# Altium PCB master-ESP32-GPS.PcbDoc
Units mm, origin at the board's own origin, x right, y up, seen from the top; angles counter-clockwise.
Board outline 118.11 x 88.9 mm, 4 copper layers (Top Layer, Signal Layer 1, Signal Layer 2, Bottom Layer), stack 0.778 mm thick; 13 components, 15 nets, 85 pads, 0 vias.
Unrouted connection lines stored in the file: 16.
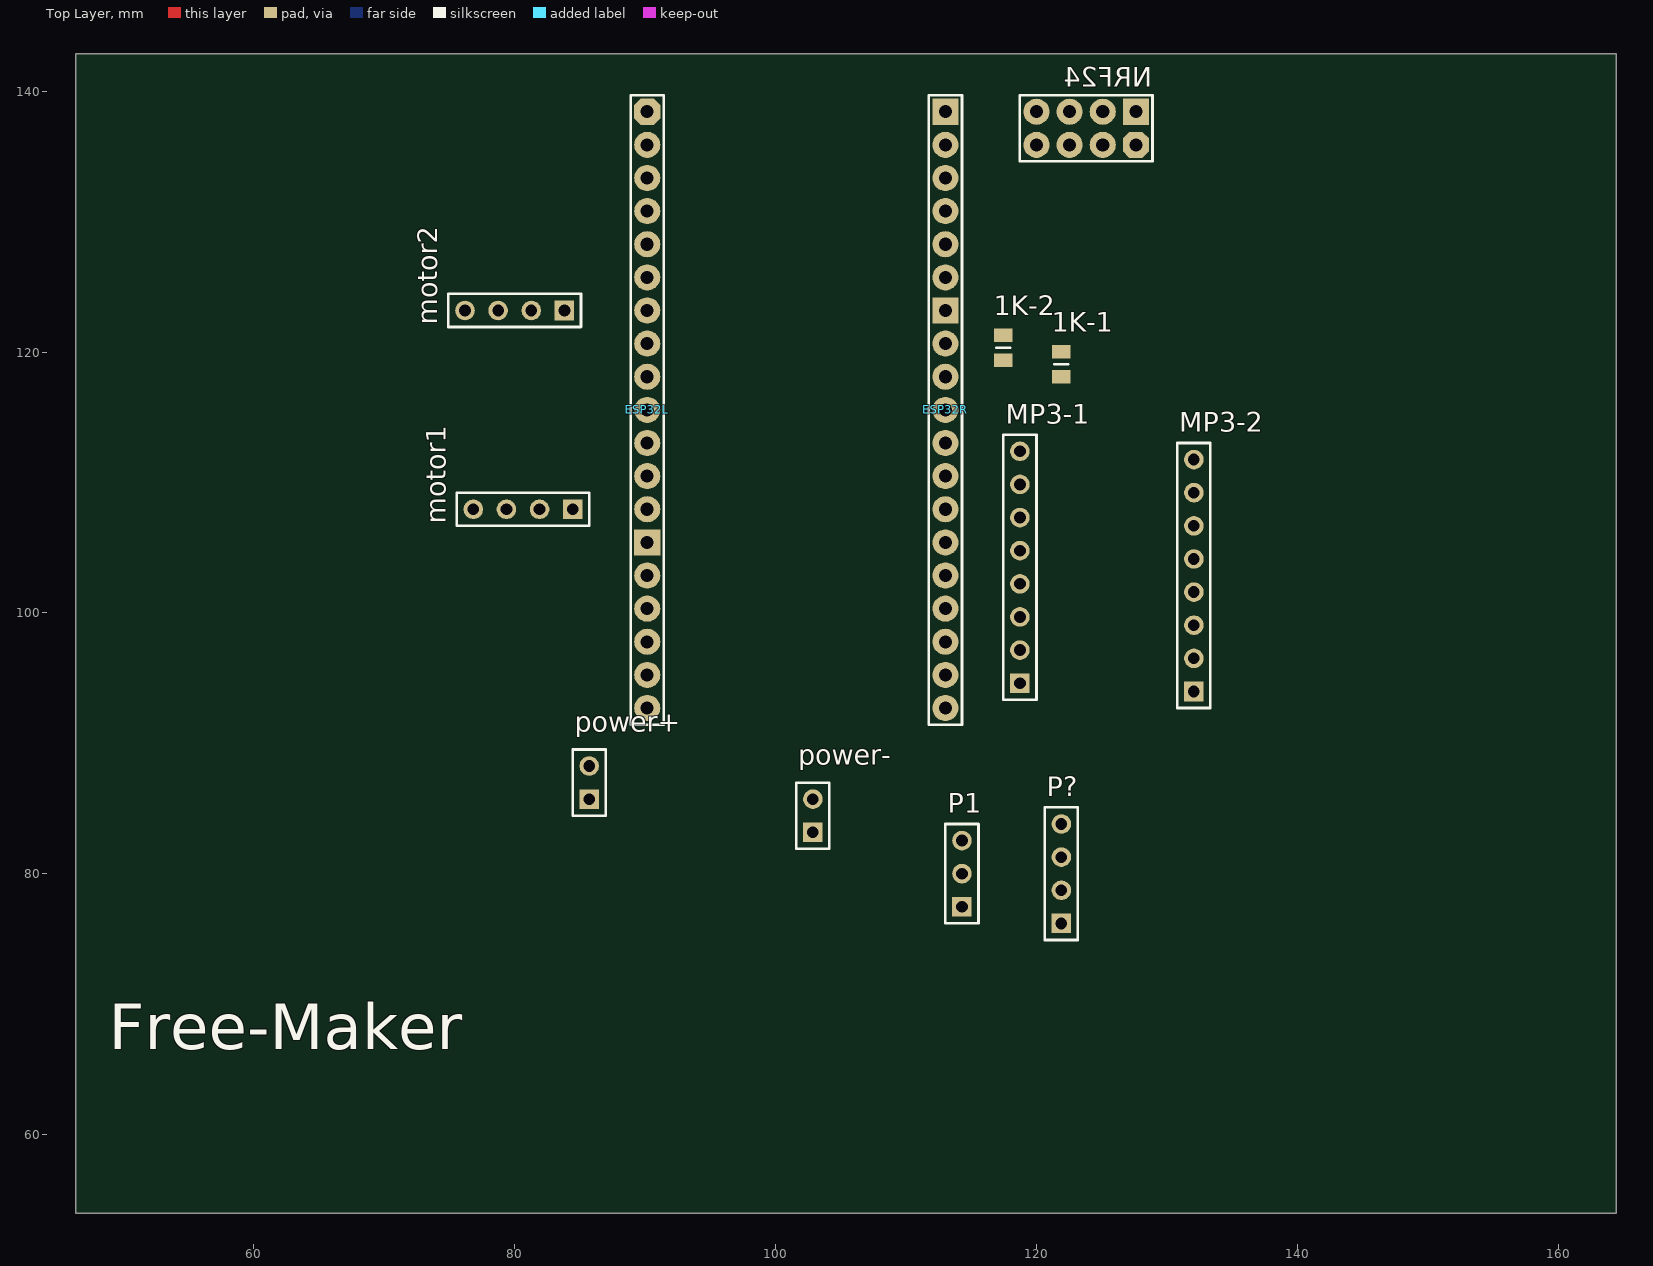
[diagram p0: Top Layer view]
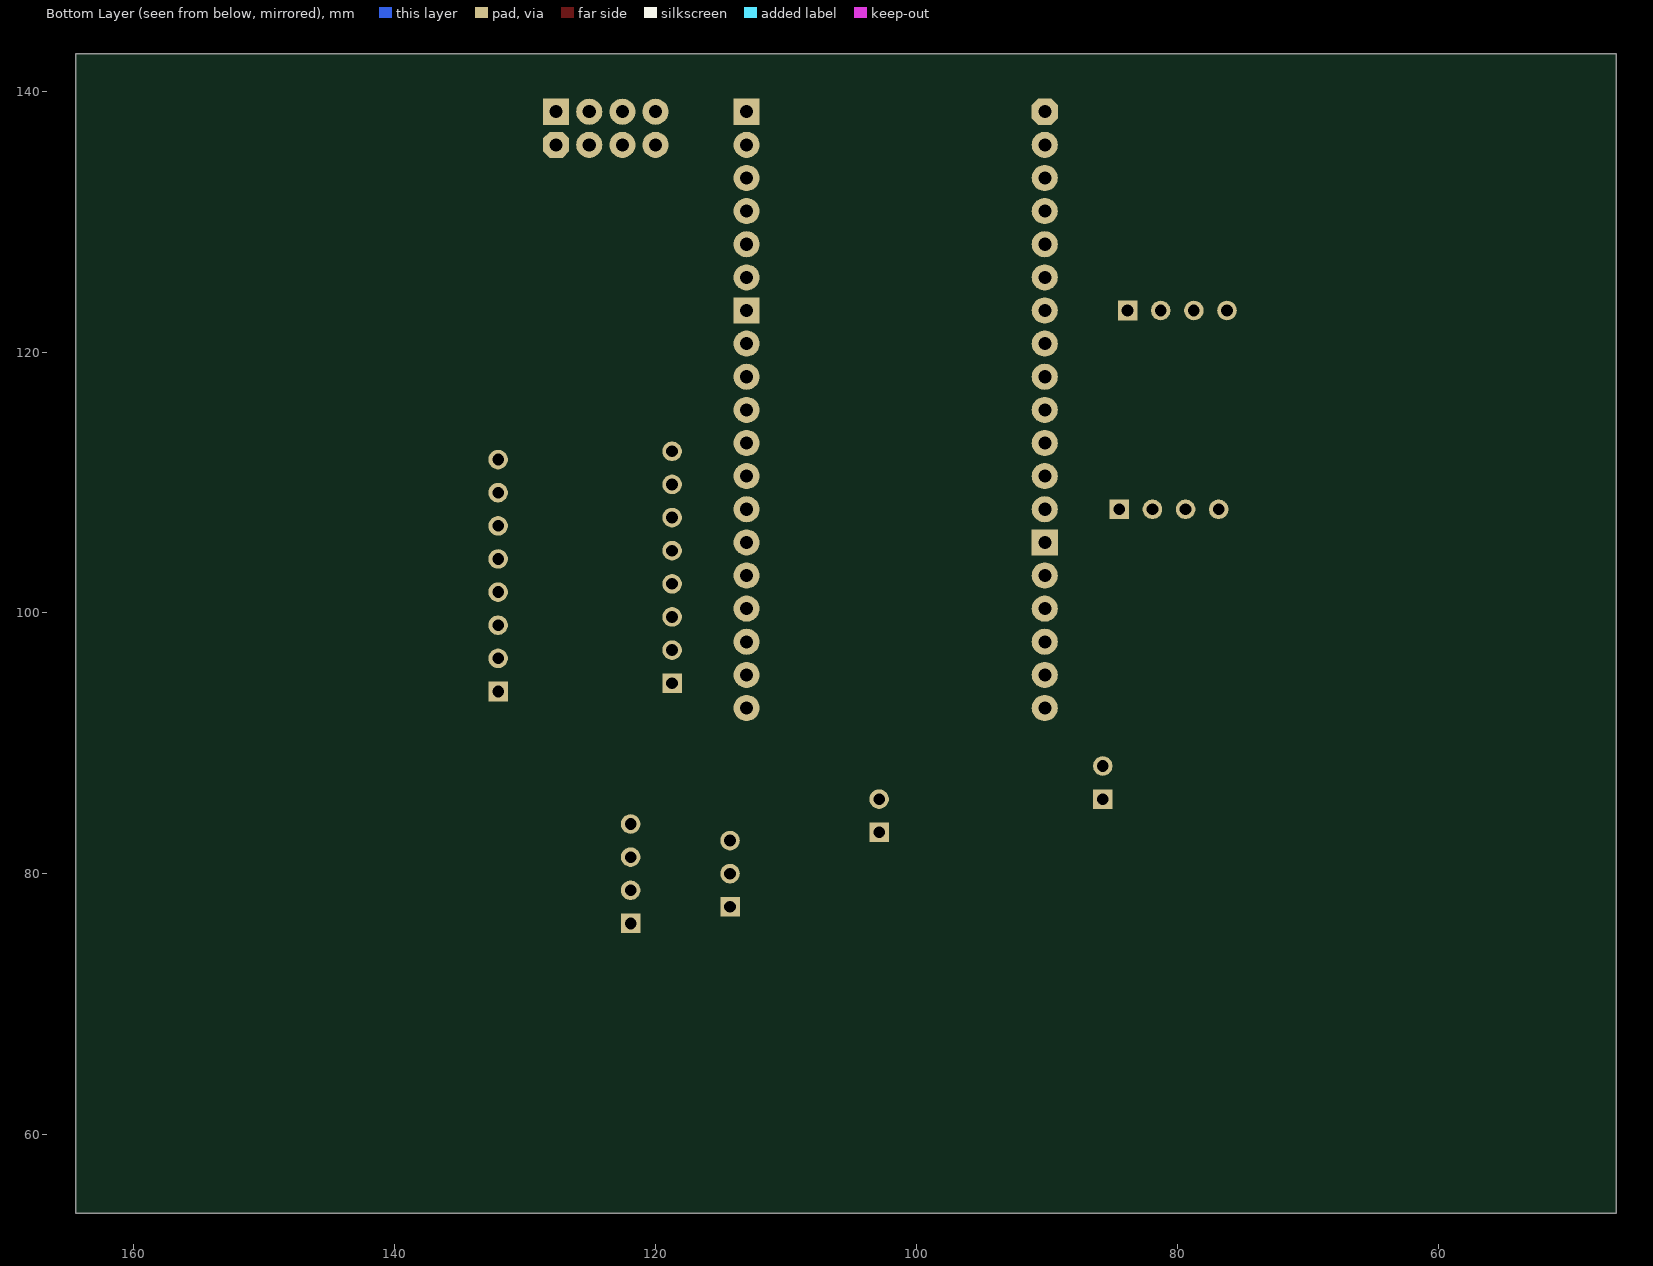
[diagram p1: Bottom Layer view, seen from below]

## Layer stack, top to bottom
Top Solder: solder mask 0.0102, Solder Resist, Dk 3.5
Top Layer: signal copper 0.0356
Dielectric 1: core 0.254, FR-4, Dk 4.2
Signal Layer 1: signal copper 0.036
Dielectric 3: prepreg 0.127, Dk 4.2
Signal Layer 2: signal copper 0.036
Dielectric 2: core 0.254, Dk 4.2
Bottom Layer: signal copper 0.0356
Bottom Solder: solder mask 0.0102, Solder Resist, Dk 3.5

## Board outline
46.355,53.975 46.355,142.875 164.465,142.875 164.465,53.975

## Design rules (kind name [scope] priority, off if disabled: settings)
Clearance [All] p1: gap=0.254 ignorepadtopadclearanceinfootprint=FALSE except(0: Arc-Hole Track-Hole SMDPad-Hole THPad-Hole Via-Hole Fill-Hole Poly-Hole Region-Hole Text-Hole)
PolygonConnect [All] p1: connectstyle=Relief reliefconductorwidth=0.254 reliefentries=4 polygonreliefangle="90 Angle" airgapwidth=0.254
RoutingVias [All] p1: holewidth=0.711 width=1.27 viastyle="Through Hole" minholewidth=0.711 minwidth=1.27 maxholewidth=0.711 maxwidth=1.27
SolderMaskExpansion [All] p1: expansion=0.102
Width Width_1 [InNet('GND','GND1','GND2','3.3V','5V')] p1: maxlimit=2 minlimit=0.254 preferedwidth=1
Width [All] p2: maxlimit=2 minlimit=0.254 preferedwidth=0.7
30 further rules are at their usual default settings.

## Components (designator, comment, footprint, x,y, rotation, side; value= is the part's Value field where it differs from the comment)
1K-1 "ERJS06J472V" RESC2012X70N 121.92,119.065 r90 top
1K-2 "ERJS06J472V" RESC2012X70N 117.475,120.335 r90 top
ESP32L "Header 19" HDR1X19#1 90.17,138.43 r270 top
ESP32R "Header 19" HDR1X19#2 113.03,138.43 r270 top
motor1 "Header 4" HDR1X4 84.455,107.95 r180 top
motor2 "Header 4" HDR1X4 83.82,123.19 r180 top
MP3-1 "Header 8" HDR1X8 118.745,94.615 r90 top
MP3-2 "Header 8" HDR1X8 132.08,93.98 r90 top
NRF24 "Header 4X2" HDR2X4 127.635,138.43 r180 top
P1 "Header 3" HDR1X3 114.3,77.47 r90 top
P? "Header 4" HDR1X4 121.92,76.2 r90 top
power+ "Header 2" HDR1X2 85.725,85.725 r90 top
power- "Header 2" HDR1X2 102.87,83.185 r90 top

## Footprints (in the part's own frame and the unit in brackets; to place one, negate y for a bottom-side part, rotate by r counter-clockwise, add the part's x,y. Pads: shape width x height; smd on the part's side, far side on the other; paste and mask are expansions set on the pad)
HDR1X2 [mm] "Connector; Header; 2 Position"
  rect 1.5x1.5 hole 0.9: 1(0,0)
  round 1.5 hole 0.9: 2(2.54,0)
  silkscreen extent -1.27,-1.27 3.81,1.27
HDR1X3 [mm] "Connector; Header; 3 Position"
  rect 1.5x1.5 hole 0.9: 1(0,0)
  round 1.5 hole 0.9: 2(2.54,0) 3(5.08,0)
  silkscreen extent -1.27,-1.27 6.35,1.27
HDR1X4 [mm] "Connector; Header; 4 Position"
  rect 1.5x1.5 hole 0.9: 1(0,0)
  round 1.5 hole 0.9: 2(2.54,0) 3(5.08,0) 4(7.62,0)
  silkscreen extent -1.27,-1.27 8.89,1.27
HDR1X8 [mm] "Connector; Header; 8 Position"
  rect 1.5x1.5 hole 0.9: 1(0,0)
  round 1.5 hole 0.9: 2(2.54,0) 3(5.08,0) 4(7.62,0) 5(10.16,0) 6(12.7,0) 7(15.24,0) 8(17.78,0)
  silkscreen extent -1.27,-1.27 19.05,1.27
HDR1X19#1 [mm] "Connector; Header; 19 Position"
  oct 2x2 hole 1: 1(0,0)
  round 2 hole 1: 2(2.54,0) 3(5.08,0) 4(7.62,0) 5(10.16,0) 6(12.7,0) 7(15.24,0) 8(17.78,0) 9(20.32,0) 10(22.86,0) 11(25.4,0) 12(27.94,0) 13(30.48,0) 15(35.56,0) 16(38.1,0) 17(40.64,0) 18(43.18,0) 19(45.72,0)
  rect 2x2 hole 1: 14(33.02,0)
  silkscreen extent -1.27,-1.27 46.99,1.27
HDR1X19#2 [mm] "Connector; Header; 19 Position"
  rect 2x2 hole 1: 1(0,0) 7(15.24,0)
  round 2 hole 1: 2(2.54,0) 3(5.08,0) 4(7.62,0) 5(10.16,0) 6(12.7,0) 8(17.78,0) 9(20.32,0) 10(22.86,0) 11(25.4,0) 12(27.94,0) 13(30.48,0) 14(33.02,0) 15(35.56,0) 16(38.1,0) 17(40.64,0) 18(43.18,0) 19(45.72,0)
  silkscreen extent -1.27,-1.27 46.99,1.27
HDR2X4 [mm] "Connector; Header; 4x2 Position"
  rect 2x2 hole 1: 1(0,0)
  oct 2x2 hole 1: 2(0,2.54)
  round 2 hole 1: 3(2.54,0) 4(2.54,2.54) 5(5.08,0) 6(5.08,2.54) 7(7.62,0) 8(7.62,2.54)
  silkscreen extent -1.27,-1.27 8.89,3.81
RESC2012X70N [mm]
  rect 1.05x1.4 smd: 1(-0.95,0) 2(0.95,0)
  silkscreen extent 0,-0.53 0,0.53, body extent -1,-0.63 1,0.63, height 0.7

## Part data
1K-1 1K-2: "Resistor", Manufacturer_Name=Panasonic, Arrow Part Number=ERJS06J472V, Datasheet Link=https://industrial.panasonic.com/cdbs/www-data/pdf/RDP0000/AOA0000C334.pdf, Height=0.7mm, Manufacturer_Part_Number=ERJS06J472V
ESP32L ESP32R: "Header, 19-Pin", LatestRevisionDate=17-Jul-2002, LatestRevisionNote="Re-released for DXP Platform.", Publisher="Altium Limited"
motor1 motor2 P?: "Header, 4-Pin", LatestRevisionDate=17-Jul-2002, LatestRevisionNote="Re-released for DXP Platform.", Publisher="Altium Limited"
MP3-1 MP3-2: "Header, 8-Pin", LatestRevisionDate=17-Jul-2002, LatestRevisionNote="Re-released for DXP Platform.", Publisher="Altium Limited"
NRF24: "Header, 4-Pin, Dual row", LatestRevisionDate=17-Jul-2002, LatestRevisionNote="Re-released for DXP Platform.", Publisher="Altium Limited"
P1: "Header, 3-Pin", LatestRevisionDate=17-Jul-2002, LatestRevisionNote="Re-released for DXP Platform.", Publisher="Altium Limited"
power+ power-: "Header, 2-Pin", LatestRevisionDate=17-Jul-2002, LatestRevisionNote="Re-released for DXP Platform.", Publisher="Altium Limited"

## Nets (pads, with @x,y where several pads share a name; then routed paths per layer and width w, separated by ;. In a path a pad name is that pad's centre, name@x,y a point inside that pad or via, vN(x,y) a via of type N, cw(c..) or ccw(c..) an arc to the next point about the centre after c; other vN are vias at no path point)
3.3V: ESP32L.1 NRF24.2
GND: ESP32R.7 MP3-1.7
GND1: ESP32R.1 NRF24.1 power-.1 power-.2
GND2: ESP32L.14
Net1K-1_1: 1K-1.1 ESP32R.11
Net1K-1_2: 1K-1.2 MP3-1.2
Net1K-2_1: 1K-2.1 ESP32R.12
Net1K-2_2: 1K-2.2 MP3-1.3
NetESP32L_19: ESP32L.19 power+.1 power+.2
NetESP32R_2: ESP32R.2 NRF24.6
NetESP32R_8: ESP32R.8 NRF24.7
NetESP32R_9: ESP32R.9 NRF24.5
NetESP32R_10: ESP32R.10 NRF24.4
NetESP32R_13: ESP32R.13 NRF24.3
VCC: MP3-1.1
pads on no net: ESP32L.2 ESP32L.3 ESP32L.4 ESP32L.5 ESP32L.6 ESP32L.7 ESP32L.8 ESP32L.9 ESP32L.10 ESP32L.11 ESP32L.12 ESP32L.13 ESP32L.15 ESP32L.16 ESP32L.17 ESP32L.18 ESP32R.3 ESP32R.4 ESP32R.5 ESP32R.6 ESP32R.14 ESP32R.15 ESP32R.16 ESP32R.17 ESP32R.18 ESP32R.19 motor1.1 motor1.2 motor1.3 motor1.4 motor2.1 motor2.2 motor2.3 motor2.4 MP3-1.4 MP3-1.5 MP3-1.6 MP3-1.8 MP3-2.1 MP3-2.2 MP3-2.3 MP3-2.4 MP3-2.5 MP3-2.6 MP3-2.7 MP3-2.8 NRF24.8 P1.1 P1.2 P1.3 P?.1 P?.2 P?.3 P?.4
copper on no net: | length 0.6
  Bottom Layer w0.7: 113.03,100.33 113.665,100.33

## Silkscreen, mask and mechanical layers (free items; w line width, h text height)
Top Overlay:
  text "Free-Maker" at 48.895,65.405 h6
Mechanical 1:
  lines w0.254: 46.355,53.975 46.355,142.875 89.535,142.875 164.465,142.875 164.465,81.439 164.465,70.961 164.465,65.405 164.465,57.071 164.465,53.975 46.355,53.975